# Altium PCB DE-080324.PcbDoc
Units mm, origin at the board's own origin, x right, y up, seen from the top; angles counter-clockwise.
Board outline 48 x 48 mm, 2 copper layers (Top Layer, Bottom Layer); 56 components, 42 nets, 189 pads, 13 vias.
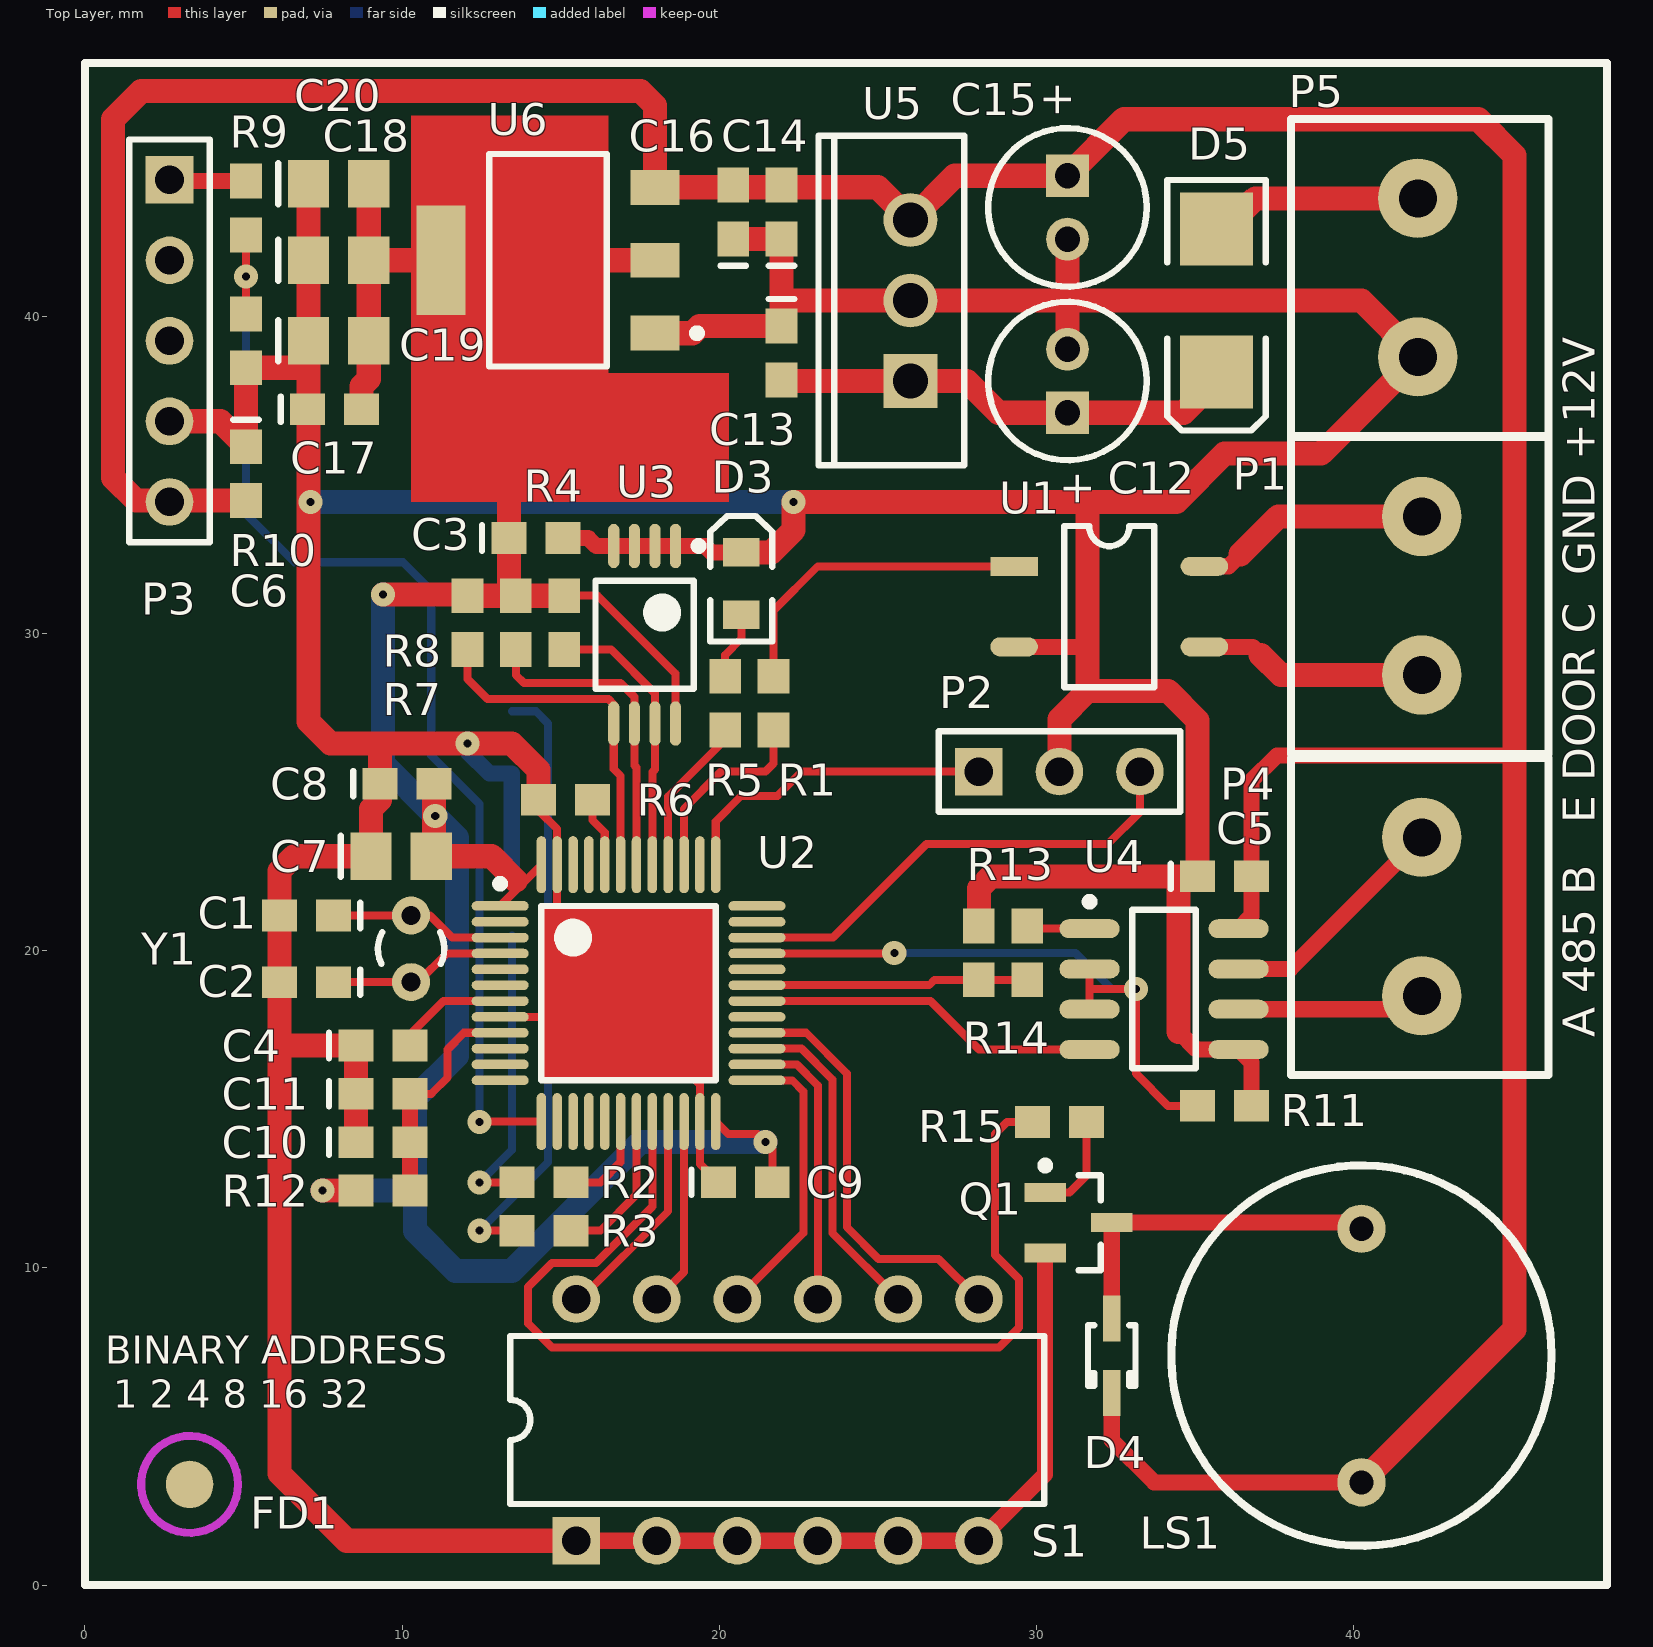
[diagram p0: Top Layer view]
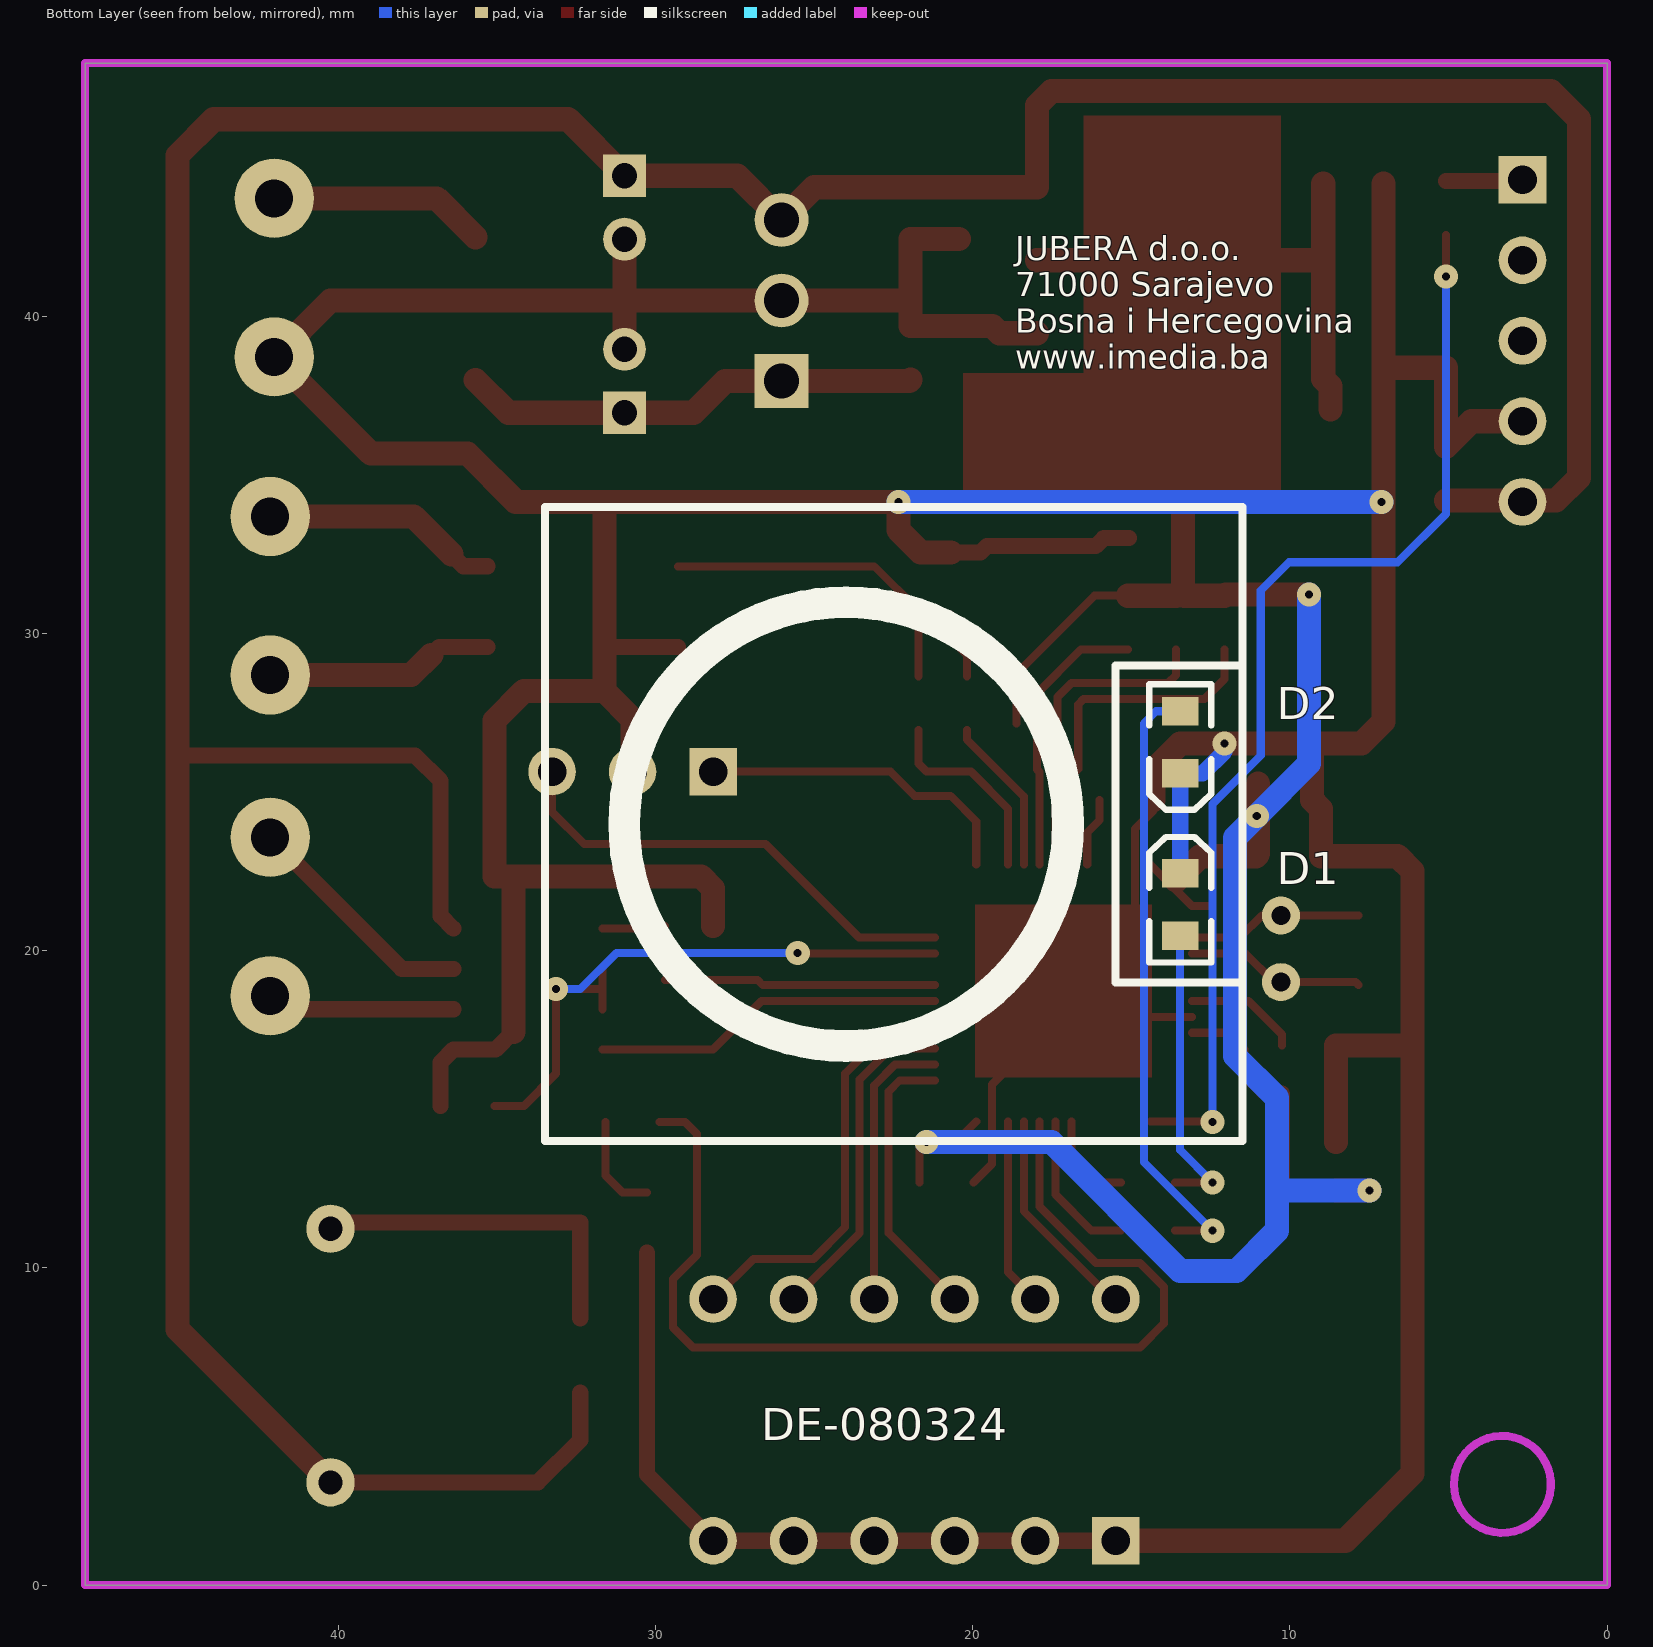
[diagram p1: Bottom Layer view, seen from below]

## Layer stack, top to bottom
Top Solder: solder mask 0.0102, Solder Resist, Dk 3.5
Top Layer: signal copper 0.0356
Dielectric 1: dielectric 0.32, FR-4, Dk 4.8
Bottom Layer: signal copper 0.0356
Bottom Solder: solder mask 0.0102, Solder Resist, Dk 3.5

## Board outline
0,0 0,48 48,48 48,0

## Design rules (kind name [scope] priority, off if disabled: settings)
Clearance [All] p1: gap=0.254 ignorepadtopadclearanceinfootprint=FALSE except(0: Arc-Hole Track-Hole SMDPad-Hole THPad-Hole Via-Hole Fill-Hole Poly-Hole Region-Hole Text-Hole; 0.127: SMDPad-SMDPad; 0.203: Arc-Arc Arc-Track Arc-SMDPad Track-Track Track-SMDPad)
PolygonConnect [All] p1: connectstyle=Relief reliefconductorwidth=0.254 reliefentries=4 polygonreliefangle="90 Angle" airgapwidth=0.254
RoutingVias [All] p1: holewidth=0.711 width=1.27 viastyle="Through Hole" minholewidth=0.254 minwidth=0.762 maxholewidth=0.762 maxwidth=1.524
SolderMaskExpansion [All] p1: expansion=0.102
Width [All] p1: maxlimit=2.54 minlimit=0.254 preferedwidth=0.762
30 further rules are at their usual default settings.

## Components (designator, comment, footprint, x,y, rotation, side; value= is the part's Value field where it differs from the comment)
C1 "6p8" 0603 6.985,21.116 r180 top
C2 "6p8" 0603 6.985,19.016 r180 top
C3 "100nF" 0603 14.224,33.02 r0 top
C4 "100nF" 0603 9.398,17.018 r0 top
C5 "100nF" 0603 35.941,22.352 r0 top
C6 "10nF" 0603 5.08,35.052 r270 top
C7 "10uF" 0805 9.972,22.987 r0 top
C8 "100nF" 0603 10.16,25.273 r0 top
C9 "100nF" 0603 20.828,12.7 r0 top
C10 "10nF" 0603 9.398,13.97 r0 top
C11 "1uF" 0603 9.398,15.494 r0 top
C12 "22uF" CAPPR2-5X11 30.988,37.973 r90 top value=47uF
C13 "100nF" 0603 21.971,38.862 r270 top
C14 "100nF" 0603 21.971,43.307 r90 top
C15 "22uF" CAPPR2-5X11 30.988,43.45 r270 top value=47uF
C16 "100nF" 0603 20.447,43.307 r90 top
C17 "100nF" 0603 7.874,37.084 r0 top
C18 "10uF" 0805 8.001,41.783 r0 top
C19 "10uF" 0805 8.001,39.243 r0 top
C20 "10uF" 0805 8.001,44.196 r0 top
D1 "RED_LED" 2.0X1.25X1.2 13.462,21.463 r90 bottom
D2 "GREEN_LED" 2.0X1.25X1.2 13.462,26.579 r270 bottom
D3 "STATUS_LED" 2.0X1.25X1.2 20.701,31.587 r90 top
D4 "NF" SOD323 32.385,7.239 r270 top
D5 "1N4001" SMB 35.687,40.513 r270 top
FD1 "Fiducial" Fiducial 3.302,3.175 r0 top
LS1 "Buzzer 5Vdc" BUZZER 40.259,7.239 r90 top
P1 "TERMINAL BLOK 2" "TERMINAL BLOK 2" 42.164,31.202 r180 top
P2 "ICSP" HDR1X3 28.194,25.654 r0 top
P3 "RDM6300" HDR1X5 2.667,44.323 r270 top
P4 "TERMINAL BLOK 2" "TERMINAL BLOK 2" 42.164,21.082 r180 top
P5 "TERMINAL BLOK 2" "TERMINAL BLOK 2" 42.037,41.235 r0 top
Q1 "MMBT2222" SOT23_N 31.335,11.43 r0 top
R1 "330R" ERA-0603 21.717,27.813 r90 top
R2 "330R" ERA-0603 14.478,12.7 r180 top
R3 "330R" ERA-0603 14.478,11.176 r180 top
R4 "2K2" ERA-0603 15.113,30.353 r90 top
R5 "2K2" ERA-0603 20.193,27.813 r90 top
R6 "10K" ERA-0603 15.152,24.765 r180 top
R7 "2K2" ERA-0603 13.589,30.353 r90 top
R8 "2K2" ERA-0603 12.065,30.353 r90 top
R9 "1K2" ERA-0603 5.08,43.434 r90 top
R10 "2K2" ERA-0603 5.08,39.243 r90 top
R11 "10K" ERA-0603 35.941,15.113 r0 top
R12 "10R" ERA-0603 9.398,12.446 r0 top
R13 "1K2" ERA-0603 29.718,19.939 r270 top
R14 "2K2" ERA-0603 28.194,19.939 r270 top
R15 "2K2" ERA-0603 30.734,14.605 r0 top
S1 "SW DIP-6" DIP-12/SW 21.844,5.207 r0 top
U1 "PC817" SOP4 29.306,32.131 r0 top
U2 "STM32F030C8T6" STM-LQFP48_N 17.145,18.669 r0 top
U3 "AT24C1024" 8A2_L 17.653,29.972 r270 top
U4 "SN75176BD" D008_L 34.036,18.796 r0 top
U5 "L7805ABV" TO220ABN 26.035,40.513 r90 top
U6 "REG1117-3.3" ZZ311 14.605,41.783 r90 top
Y1 "32.768MHz" R26 10.287,20.066 r180 top

## Footprints (in the part's own frame and the unit in brackets; to place one, negate y for a bottom-side part, rotate by r counter-clockwise, add the part's x,y. Pads: shape width x height; smd on the part's side, far side on the other; paste and mask are expansions set on the pad)
2.0X1.25X1.2 [mm] "SM LED; 2 Flat Leads"
  rect 0.9x1.15 smd: 1(-0.98,0) 2(0.98,0)
  silkscreen extent -1.83,-0.97 2.13,0.97
8A2_L [mm] "TSOP, 8-Leads, Body 3x4.4mm, Pitch 0.65mm, IPC High Density"
  oval 1.4x0.35 smd: 1(-2.8,0.975) 2(-2.8,0.325) 3(-2.8,-0.325) 4(-2.8,-0.975) 5(2.8,-0.975) 6(2.8,-0.325) 7(2.8,0.325) 8(2.8,0.975)
  silkscreen extent -2.92,-1.55 1.7,1.83, body extent -2.25,-1.55 2.25,1.55, height 1.2
0603 [mm] "Chip Capacitor; Body 1.6 x 0.8 mm (LxW typ)"
  rect 1.1x1 smd: 1(-0.85,0) 2(0.85,0)
  silkscreen extent -1.7,-0.4 -1.7,0.4
0805 [mm] "Chip Capacitor; Body 2.0 x 1.2 mm (LxW typ)"
  rect 1.3x1.5 smd: 1(-0.95,0) 2(0.95,0)
  silkscreen extent -1.9,-0.65 -1.9,0.65
BUZZER [mil] "5Vdc PCB buzzer"
  round 60 hole 30: 1(-157.48,0) 2(157.48,0)
  silkscreen extent -236,-236 236,236, body extent -236,-236 236,236, height 378
CAPPR2-5X11 [mm] "Capacitor, Electrolytic, Radial; Body 5 x 11 mm (Dia.xH typ); Pin Spacing 2 mm (typ)"
  rect 1.35x1.35 hole 0.8: 1(-1,0)
  round 1.35 hole 0.8: 2(1,0)
  silkscreen extent -2.5,-2.5 2.5,2.5
D008_L [mm] "SOIC, 8-Leads, Body 4.9x3.9mm, Pitch 1.27mm, IPC High Density"
  oval 1.9x0.6 smd: 1(-2.35,1.905) 2(-2.35,0.635) 3(-2.35,-0.635) 4(-2.35,-1.905) 5(2.35,-1.905) 6(2.35,-0.635) 7(2.35,0.635) 8(2.35,1.905)
  silkscreen extent -2.47,-2.5 1,2.88, body extent -2,-2.5 2,2.5, height 1.75
DIP-12/SW [mm] "DIP Switch; 12 Leads"
  rect 1.5x1.5 hole 0.9: 1(-6.35,-3.81)
  round 1.5 hole 0.9: 2(-3.81,-3.81) 3(-1.27,-3.81) 4(1.27,-3.81) 5(3.81,-3.81) 6(6.35,-3.81) 7(6.35,3.81) 8(3.81,3.81) 9(1.27,3.81) 10(-1.27,3.81) 11(-3.81,3.81) 12(-6.35,3.81)
  silkscreen extent -8.43,-2.65 8.41,2.65
ERA-0603 [mm] "Chip Resistor; Body 1.6 x 0.8 mm (LxW typ)"
  rect 1.1x1 smd: 1(-0.85,0) 2(0.85,0)
Fiducial [mm] "Pick and place machine mark"
  round 1.5 smd paste+0 mask+0.8: 3(0,0)
  Keep-Out Layer circle w0.254: c0,0 r1.529
HDR1X3 [mm] "Connector; Header; 3 Position"
  rect 1.5x1.5 hole 0.9: 1(0,0)
  round 1.5 hole 0.9: 2(2.54,0) 3(5.08,0)
  silkscreen extent -1.27,-1.27 6.35,1.27
HDR1X5 [mm] "Connector; Header; 5 Position"
  rect 1.5x1.5 hole 0.9: 1(0,0)
  round 1.5 hole 0.9: 2(2.54,0) 3(5.08,0) 4(7.62,0) 5(10.16,0)
  silkscreen extent -1.27,-1.27 11.43,1.27
R26 [mm] "Crystal, Thru-Hole; 2 Leads; Body 2.1 x 6.2 mm (Dia.xH)"
  round 1.2 hole 0.6: 1(0,1.05) 2(0,-1.05)
  silkscreen extent -1.05,-0.53 1.05,0.48
SMB [mm] "DO-214-AA/SMB; 2 C-Bend Leads; Body 5.3 x 3.6 mm, inc. leads (LxW)"
  rect 2.3x2.3 smd: 1(-2.25,0) 2(2.25,0)
  silkscreen extent -3.8,-1.55 4.1,1.55
SOD323 [mm] "SOD-323/SC-76; 2 Leads; Body 1.7 x 1.3 mm, (LxW)"
  rect 1.45x0.55 smd: 1(1.175,0) 2(-1.175,0)
  silkscreen extent -0.95,-0.75 0.95,0.75
SOP4 [mm]
  rect 1.5x0.6 smd: 1(0,0)
  oval 1.5x0.6 smd: 2(0,-2.54) 3(6,-2.54) 4(6,0)
  silkscreen extent 1.58,-3.81 4.42,1.27
SOT23_N [mm] "SOT23, 3-Leads, Body 2.9x1.3mm, Pitch 0.95mm, Lead Span 2.3mm, IPC Medium Density"
  rect 1.3x0.6 smd: 1(-1.05,0.95) 2(-1.05,-0.95) 3(1.05,0)
  silkscreen extent -1.17,-1.5 0.7,1.92, body extent -0.7,-1.5 0.7,1.5, height 1.1
STM-LQFP48_N [mm] "QFP, 48-Leads, Body 7x7mm, Pitch 0.5mm, IPC Medium Density"
  oval 1.8x0.3 smd: 1(-4.05,2.75) 2(-4.05,2.25) 3(-4.05,1.75) 4(-4.05,1.25) 5(-4.05,0.75) 6(-4.05,0.25) 7(-4.05,-0.25) 8(-4.05,-0.75) 9(-4.05,-1.25) 10(-4.05,-1.75) 11(-4.05,-2.25) 12(-4.05,-2.75) 25(4.05,-2.75) 26(4.05,-2.25) 27(4.05,-1.75) 28(4.05,-1.25) 29(4.05,-0.75) 30(4.05,-0.25) 31(4.05,0.25) 32(4.05,0.75) 33(4.05,1.25) 34(4.05,1.75) 35(4.05,2.25) 36(4.05,2.75)
  oval 0.3x1.8 smd: 13(-2.75,-4.05) 14(-2.25,-4.05) 15(-1.75,-4.05) 16(-1.25,-4.05) 17(-0.75,-4.05) 18(-0.25,-4.05) 19(0.25,-4.05) 20(0.75,-4.05) 21(1.25,-4.05) 22(1.75,-4.05) 23(2.25,-4.05) 24(2.75,-4.05) 37(2.75,4.05) 38(2.25,4.05) 39(1.75,4.05) 40(1.25,4.05) 41(0.75,4.05) 42(0.25,4.05) 43(-0.25,4.05) 44(-0.75,4.05) 45(-1.25,4.05) 46(-1.75,4.05) 47(-2.25,4.05) 48(-2.75,4.05)
  silkscreen extent -4.17,-2.75 2.75,3.57, body extent -3.5,-3.5 3.5,3.5, height 1.6
"TERMINAL BLOK 2" [mm] "2 pinski terminal blok konektor"
  round 2.5 hole 1.2: 1(0,-2.5) 2(0,2.5)
  silkscreen extent -4,-5 4.13,5
TO220ABN [mm] "TO, Thru-Hole, Vertical, Heatsink Mounted; 3 In-Line Leads; Pitch 2.54 mm; Pin sequence 1, 3, 2"
  rect 1.7x1.7 hole 1.1: 1(-2.54,0)
  round 1.7 hole 1.1: 2(2.54,0) 3(0,0)
  silkscreen extent -5.2,-1.7 5.2,2.9
ZZ311 [mm] "SOT-223/SC-73; 4 Leads; Body 6.7 x 7.3 mm, inc. leads (LxW max)"
  rect 1.1x1.55 smd: 1(-2.3,-3.375) 2(0,-3.375) 3(2.3,-3.375)
  rect 3.45x1.55 smd: 4(0,3.375)
  silkscreen extent -3.35,-4.83 3.35,1.85

## Part data
C1 C2 C3 C4 C5 C6 C8 C9 C10 C11 C13 C14 C16 C17: library part C0603, "Ceramic Chip Capacitor - Standard", PackageDocument=Mar-2001, Code_IPC="1608 [0603]", Code_JEITA=0603, ComponentLink1Description="Manufacturer Link", ComponentLink1URL=http://www.kemet.com/, ComponentLink2Description=Datasheet, ComponentLink2URL=http://www.kemet.com/kemet/web/homepage/kechome.nsf/vapubfilesname/F3102TA.pdf/$file/F3102TA.pdf, DatasheetDocument=Mar-2001, LatestRevisionDate=19-Mar-2004, LatestRevisionNote="Silkscreen size reduced.", Note="Footprint corresponds to dimensions for bulk cassette packaging. This case size has tightened tolerances.", PackageReference=0603, Published=17-Jul-2002, Publisher="Altium Limited"
C7 C18 C19 C20: library part C0805, "Ceramic Chip Capacitor - Standard", PackageDocument=Mar-2001, Code_IPC=2012[0805], Code_JEITA=0805, ComponentLink1Description="Manufacturer Link", ComponentLink1URL=http://www.kemet.com/, ComponentLink2Description=Datasheet, ComponentLink2URL=http://www.kemet.com/kemet/web/homepage/kechome.nsf/vapubfilesname/F3102TA.pdf/$file/F3102TA.pdf, DatasheetDocument=Mar-2001, LatestRevisionDate=19-Mar-2004, LatestRevisionNote="Silkscreen size reduced.", Note="Footprint corresponds to dimensions for bulk cassette packaging. This case size has tightened tolerances.", PackageReference=0805, Published=17-Jul-2002, Publisher="Altium Limited"
C12 C15: library part EKA00AA247F00, "Aluminum Electrolytic Capacitor, Radial Style with Long Leads: 47uF, 35V", ComponentLink1Description="Manufacturer Link", ComponentLink1URL=http://www.vishay.com/, ComponentLink2Description=Datasheet, ComponentLink2URL=http://www.vishay.com/docs/25014/eka.pdf, DatasheetDocument=20-Feb-2001, DrillSize="Nominal, Rounded To The Nearest 0.1mm", Note="Refer to Manufacturer's Data Sheets for other lead formations", PackageReference=CAPPR2-5X11, Published=19-Mar-2004, Publisher="Altium Limited"
D1 D2 D3: library part HSMC-C540-F0001, "Top Mount AS AlInGaP Red Oval Lens High Brightness", LED_Colour=Red, PackageDocument=30-Apr-2002, ComponentLink1Description="Manufacturer Link", ComponentLink1URL=http://www.agilent.com/, ComponentLink2Description=Datasheet, ComponentLink2URL=http://cp.literature.agilent.com/litweb/pdf/5988-5794EN.pdf, DatasheetDocument=7-Mar-2002, LuminousIntensity="96mcd (Minimum).", PackageReference=2.0X1.25X1.2, PCB_Layout="Complies with manufacturer's recommendation.", Published=11-Dec-2002, Publisher="Altium Limited"
D4: library part BAS321, "General-purpose Diode", ComponentLink1Description="Manufacturer Link", ComponentLink1URL=http://www.semiconductors.philips.com/, ComponentLink2Description=Datasheet, ComponentLink2URL=http://www.semiconductors.philips.com/acrobat/datasheets/BAS321_2.pdf, DatasheetVersion=9-Feb-1999, LatestRevisionDate=19-Mar-2004, LatestRevisionNote="Silkscreen size reduced.", PackageDescription="SOD-323/SC-76; 2 Leads; Body 1.7 x 1.3 mm, (LxW)", PackageReference=SOD323, PackageVersion=May-1999, Published=17-Sep-2003, Publisher="Altium Limited"
D5: library part 10BQ100, "Schottky Rectifier", ComponentLink1Description="Manufacturer Link", ComponentLink1URL=http://www.irf.com/, ComponentLink2Description=Datasheet, ComponentLink2URL=http://www.irf.com/product-info/datasheets/data/10bq100.pdf, DatasheetVersion=PD-2.437A, LatestRevisionDate=17-Jul-2002, LatestRevisionNote="Re-released for DXP Platform.", PackageDescription="DO-214-AA/SMB; 2 C-Bend Leads; Body 5.3 x 3.6 mm, inc. leads (LxW)", PackageReference=SMB, Published=8-Jun-2000, Publisher="Altium Limited"
FD1: library part Fiduchial, "Fiduchial mark"
LS1: library part BUZZER, "5Vdc PCB buzzer"
P1 P4 P5: "2 pinski terminal blok"
P2: library part "Header 3", "Header, 3-Pin", LatestRevisionDate=17-Jul-2002, LatestRevisionNote="Re-released for DXP Platform.", Publisher="Altium Limited"
P3: library part "Header 5", "Header, 5-Pin", LatestRevisionDate=17-Jul-2002, LatestRevisionNote="Re-released for DXP Platform.", Publisher="Altium Limited"
Q1: library part BC817, "NPN General-purpose Transistor", ComponentLink1Description="Manufacturer Link", ComponentLink1URL=http://www.semiconductors.philips.com/, ComponentLink2Description=Datasheet, ComponentLink2URL=http://www.semiconductors.philips.com/acrobat/datasheets/BC817_BC817W_BC337_5.pdf, DatasheetVersion=Jun-1999, LatestRevisionDate=12-Dec-2006, LatestRevisionNote="IPC-7351 Footprint Added.", PackageDescription="3-Pin SOT-23 Package 0.95 mm Pitch, 2.3 mm Lead Span", PackageReference=SOT23, PackageVersion=May-1999, Published=17-Sep-2003, Publisher="Altium Limited"
R1 R2 R3 R4 R5 R6 R7 R8 R9 R10 R11 R12 R13 R14 R15: library part ERAV, "Metal Film Thermosensitive Chip Resistor, 0.56 Ohm to 10k Ohm Range, 5% Tolerance, 0603 Size, 0.063 W", PackageDocument=Mar-2003, Code_IPC="1608 [0603]", ComponentLink1Description="Manufacturer Link", ComponentLink1URL=http://www.panasonic.com/industrial/components/resistive_products.htm, ComponentLink2Description=Datasheet, ComponentLink2URL=http://www.panasonic.com/industrial/components/pdf/AOF0000CE1.pdf, LatestRevisionDate=19-Mar-2004, LatestRevisionNote="Silkscreen size reduced.", Note="If flow soldering, adjust pad width of PCB Footprint to 0.7 - 0.8 times the width of the resistor.", PackageReference=ERA-0603, Published=17-Dec-2003, Publisher="Altium Limited"
S1: "DIP Switch, 6 Position, SPST", LatestRevisionDate=17-Jul-2002, LatestRevisionNote="Re-released for DXP Platform.", PackageDescription="DIP Switch; 12 Leads", PackageReference=DIP-12/SW, Published=24-Mar-1999, Publisher="Altium Limited"
U1: library part "PC817 optocoupler", "4-Pin Phototransistor Optocoupler", DatasheetVersion=Nov-2003, LatestRevisionDate=04-Mar-2005, LatestRevisionNote="Sch pins 3 & 4 Swapped.", PackageReference=DIP-4, Published=24-Mar-1999, Publisher="Altium Limited"
U2: "ARM Cortex-M0 32-bit MCU, 64 KB Flash, 8 KB Internal RAM, 39 I/Os, 48-pin LQFP, -40 to 85 degC, Tray", I/Os (High Current)=39, Operating Frequency(F) (Processor speed) (MHz)=48, Supplier Part Number 1=497-14043-ND, Supply Voltage(Vcc) min (V)=2.4, ComponentLink1Description="Manufacturer URL", ComponentLink1URL=http://www.st.com/web/en/home.html, ComponentLink2Description=Datasheet, ComponentLink2URL=http://www.st.com/st-web-ui/static/active/en/resource/technical/document/datasheet/DM00088500.pdf, ComponentLink3Description="Package Specification", ComponentLink3URL=http://www.st.com/st-web-ui/static/active/en/resource/technical/document/datasheet/DM00058181.pdf, Core="ARM Cortex-M0", DatasheetVersion="Rev. 1", FLASH Size (Prog) (kB)=64, Internal RAM Size (kB)=8, Mounting Technology="Surface Mount", PackageDescription="48-Pin Low Profile Quad Flat Package, 7 x 7 mm Body, 0.5 mm Pitch", PackageReference=LQFP48, PackageVersion="Rev. 6, 06/2013", Packing=Tray, PartNumber=STM32F030C8T6, Supplier 1=Digi-Key, Supplier 2=Newark, Supplier 3=Mouser, Supplier Part Number 2=06X3647, Supplier Part Number 3=511-STM32F030C8T6
U3: library part AT24C02B-TP25-T, "2Kbit (256 x 8), 2-wire Bus Automotive Serial EEPROM with full memory Write Protect, 2.5V, 8-Pin TSSOP, Tape & Reel", Code_JEDEC=MO-153-AA, ComponentLink1Description="Manufacturer Link", ComponentLink1URL=http://www.atmel.com/products/serial/default.asp, ComponentLink2Description=Datasheet, ComponentLink2URL=http://www.atmel.com/dyn/resources/prod_documents/doc8517.pdf, ComponentLink3Description="Atmel.com Home", ComponentLink3URL=http://www.atmel.com, DatasheetVersion="8517C,  Jan-2009", PackageDescription="8-Lead, 4.4 mm Body, Plastic Thin Shrink Small Outline Package (TSSOP)", PackageReference=8A2, PackageVersion="revD, Dec-2009", Published=20-Sep-2010, Publisher="Altium Limited"
U4: "Differential Bus Transceiver", Code_IPC=SOIC127P600-8, ComponentLink1Description="Manufacturer Link", ComponentLink1URL=http://www.ti.com/, ComponentLink2Description=Datasheet, ComponentLink2URL=http://www-s.ti.com/sc/ds/sn75176b.pdf, DatasheetVersion=Sep-1989, LatestRevisionDate=13-Apr-2006, LatestRevisionNote="IPC-7351 Footprint Added.", Note="Receiver Hysteresis of 50mV Typical", PackageDescription="8-Pin Small Outline Integrated Circuit 1.27 mm Pitch", PackageReference=D008, PackageVersion=Jan-1998, Published=15-May-2002, Publisher="Altium Limited"
U5: "Precision 1A Regulator", ComponentLink1Description="Manufacturer Link", ComponentLink1URL=http://www.st.com/, ComponentLink2Description=Datasheet, ComponentLink2URL=http://www.st.com/stonline/products/literature/ds/2144/l7805ab.pdf, DatasheetVersion=Nov-1999, LatestRevisionDate=17-Jul-2002, LatestRevisionNote="Re-released for DXP Platform.", Note="Tab is connected to pin 3 (GND).", PackageDescription="TO, Thru-Hole, Vertical, Heatsink Mounted; 3 In-Line Leads; Pitch 2.54 mm; Pin sequence 1, 3, 2", PackageReference=TO220ABN, PackageVersion=Jun-1998, Published=24-Aug-2001, Publisher="Altium Limited"
U6: "800mA and 1A Low Dropout Positive Regulator 2.85V, 3.3V, 5V, and Adjustable", ComponentLink1Description="Manufacturer Link", ComponentLink1URL=http://www.ti.com/, ComponentLink2Description=Datasheet, ComponentLink2URL=http://www-s.ti.com/sc/ds/REG1117.pdf, DatasheetVersion=Sep-1997, LatestRevisionDate=17-Jul-2002, LatestRevisionNote="Re-released for DXP Platform.", PackageDescription="SOT-223/SC-73; 4 Leads; Body 6.7 x 7.3 mm, inc. leads (LxW max)", PackageReference=ZZ311, PackageVersion=revC, Published=8-Jun-2000, Publisher="Altium Limited"
Y1: library part R26-32.768, "Tuning Fork Crystal Unit", ComponentLink1Description="Manufacturer Link", ComponentLink1URL=http://www.raltron.com/products/microcrystals/default.asp, ComponentLink2Description=Datasheet, ComponentLink2URL=http://www.raltron.com/products/pdfspecs/crystal_r38_26_145.pdf, DatasheetDocument=28-Sep-1998, LatestRevisionDate=17-Jul-2002, LatestRevisionNote="Re-released for DXP Platform.", PackageReference=R26, Published=8-Jun-2000, Publisher="Altium Limited"

## Via types
v1: diameter 0.762, hole 0.254, Top Layer to Bottom Layer, 13 vias

## Nets (pads, with @x,y where several pads share a name; then routed paths per layer and width w, separated by ;. In a path a pad name is that pad's centre, name@x,y a point inside that pad or via, vN(x,y) a via of type N, cw(c..) or ccw(c..) an arc to the next point about the centre after c; other vN are vias at no path point)
+3V3: C3.1 C7.2 C8.2 C9.2 C17.2 C18.2 C19.2 C20.2 R4.2 R7.2 R8.2 R12.1 U2.1 U2.24 U2.48 U3.8 U6.2 U6.4 | length 82
  Top Layer w0.254: U2.1@12.49,21.419 U2.1 U2.48 ; R7.2@13.374,31.242 13.335,31.203 R7.2 ; R4.2 16.168,31.203 18.628,28.743 U3.8 ; U2.24 20.29,14.224 21.209,14.224 v1(21.463,13.97) 21.678,13.755 C9.2
  Top Layer w0.762: v1(7.493,12.446) R12.1 ; C17.2 8.724,37.807 8.951,38.034 C19.2 C18.2 ; C20.2 C18.2 ; v1(9.398,31.242) 12.026,31.242 R8.2 R7.2@13.335,31.203 ; C8.2 11.01,23.075 11.028,23.034 11.075,22.987 12.827,22.987 13.589,22.225 ; R7.2@13.374,31.242 C3.1 13.374,35.433 ; R7.2 R4.2 ; U6.2 U6.4 C18.2
  Bottom Layer w0.762: v1(7.493,12.446) 10.287,12.446 10.414,12.319 ; v1(9.398,31.242) 9.398,25.908 v1(11.049,24.257) 11.735,23.571 11.735,16.688 10.414,15.367 10.414,12.319 ; v1(21.463,13.97) 17.526,13.97 13.462,9.906 11.684,9.906 10.414,11.176 10.414,12.319
+5V: C5.2 C6.2 C14.2 C15.1 C16.2 D4.1 LS1.1 P3.5 U4.8 U5.2 U6.3 | length 132.6
  Top Layer w0.508: D4.1 32.385,4.572 33.718,3.239 LS1.1 ; U4.8 36.791,21.106 C5.2 36.791,25.361 37.592,26.162 45.085,26.162
  Top Layer w0.762: C6.2 1.612,34.202 0.889,34.925 0.889,46.228 1.778,47.117 17.526,47.117 17.98,46.663 U6.3 25.005,44.083 U5.2 27.432,44.45 C15.1 32.766,46.228 43.942,46.228 45.085,45.085 45.085,26.162 45.085,8.065 LS1.1
ADDRESS_1: S1.12 U2.21 | length 6.9
  Top Layer w0.254: S1.12 15.621,9.017 18.395,11.791 U2.21
ADDRESS_2: S1.11 U2.22 | length 6
  Top Layer w0.254: S1.11 18.895,9.878 U2.22
ADDRESS_4: S1.10 U2.25 | length 9
  Top Layer w0.254: S1.10 22.657,11.1 22.657,15.57 22.308,15.919 U2.25
ADDRESS_8: S1.9 U2.26 | length 8.9
  Top Layer w0.254: U2.26 22.455,16.419 23.114,15.76 S1.9
ADDRESS_16: S1.8 U2.27 | length 10.6
  Top Layer w0.254: U2.27 22.601,16.919 23.571,15.949 23.571,11.1 S1.8
ADDRESS_32: S1.7 U2.28 | length 13.3
  Top Layer w0.254: U2.28 22.748,17.419 24.028,16.138 24.028,11.289 25.031,10.287 26.924,10.287 S1.7
BUZZER: R15.1 U2.20 | length 32.6
  Top Layer w0.254: U2.20 17.895,11.938 16.117,10.16 14.732,10.16 13.97,9.398 13.97,8.255 14.732,7.493 28.829,7.493 29.464,8.128 29.464,9.652 28.702,10.414 28.702,14.224 29.083,14.605 R15.1
DOOR_LOCK: R1.1 U2.39 | length 6.2
  Top Layer w0.254: U2.39 18.895,24.483 20.066,25.654 21.463,25.654 21.717,25.908 R1.1
I2C1_SCL: R7.1 U2.42 U3.6 | length 10.2
  Top Layer w0.254: R7.1 13.589,28.702 13.843,28.448 16.891,28.448 17.328,28.011 U3.6 17.328,25.852 17.395,25.785 U2.42 U2.42@17.415,22.719
I2C1_SDA: R8.1 U2.43 U3.5 | length 11
  Top Layer w0.254: R8.1 12.065,28.575 12.7,27.94 16.51,27.94 16.678,27.772 U3.5 16.678,25.74 16.895,25.523 U2.43
ICSP_SWCLK: P2.1 U2.37 | length 10.3
  Top Layer w0.254: U2.37 19.895,24.086 20.701,24.892 21.844,24.892 22.606,25.654 P2.1
ICSP_SWDIO: P2.3 U2.34 | length 15
  Top Layer w0.254: U2.34 23.594,20.419 26.543,23.368 32.258,23.368 33.274,24.384 P2.3
LED_GREEN: R3.1 U2.19 | length 4.8
  Top Layer w0.254: R3.1 16.256,11.176 17.395,12.315 U2.19
LED_RED: R2.1 U2.18 | length 3.1
  Top Layer w0.254: R2.1 16.256,12.7 16.895,13.339 U2.18
LED_STATUS: R5.1 U2.40 | length 5
  Top Layer w0.254: U2.40 18.395,24.872 20.193,26.67 R5.1
NetC4_2: C4.2 U2.7 | length 3.6
  Top Layer w0.254: C4.2 10.248,17.36 11.307,18.419 U2.7
NetC10_2: C10.2 C11.2 R12.2 U2.9 | length 7.2
  Top Layer w0.254: C11.2 10.922,15.494 11.43,16.002 11.43,16.891 11.958,17.419 U2.9
  Top Layer w0.508: R12.2 C10.2 C11.2
NetC12_1: C12.1 C13.2 D5.2 U5.1 | length 14.6
  Top Layer w0.762: C13.2 22.01,37.973 U5.1 27.813,37.973 28.813,36.973 C12.1 34.651,36.973 D5.2@35.687,38.009
NetD1_1: D1.1 R2.2 | length 9.4
  Top Layer w0.254: v1(12.446,12.7) R2.2
  Bottom Layer w0.254: v1(12.446,12.7) 13.462,13.716 D1.1
NetD2_1: D2.1 R3.2 | length 19.4
  Top Layer w0.254: v1(12.446,11.176) R3.2
  Bottom Layer w0.254: v1(12.446,11.176) 14.605,13.335 14.605,27.178 14.224,27.559 D2.1
NetD3_1: D3.1 R5.2 | length 2.2
  Top Layer w0.254: R5.2 20.193,29.337 20.701,29.845 D3.1
NetD4_2: D4.2 LS1.2 Q1.3 | length 11
  Top Layer w0.254: LS1.2@40.068,11.43 LS1.2
  Top Layer w0.508: D4.2 Q1.3 LS1.2@40.068,11.43
NetD5_1: D5.1 P5.2 | length 6.9
  Top Layer w0.762: D5.1@35.687,42.509 36.913,43.735 P5.2
NetP1_1: P1.1 U1.4 | length 7.5
  Top Layer w0.508: U1.4 36.068,32.131 36.449,32.512
  Top Layer w0.762: 36.449,32.512 37.639,33.702 P1.1
NetP1_2: P1.2 U1.3 | length 7.2
  Top Layer w0.508: U1.3 36.83,29.591 37.084,29.337
  Top Layer w0.762: 37.084,29.337 37.719,28.702 P1.2
NetP3_1: P3.1 R9.2 | length 2.4
  Top Layer w0.254: P3.1 P3.1@2.706,44.284
  Top Layer w0.508: P3.1@2.706,44.284 R9.2
NetP4_1: P4.1 U4.7 | length 7.5
  Top Layer w0.508: U4.7 38.013,19.431 P4.1
NetP4_2: P4.2 U4.6 | length 6
  Top Layer w0.508: U4.6 41.743,18.161 P4.2
NetQ1_1: Q1.1 R15.2 | length 3.2
  Top Layer w0.254: Q1.1 31.049,12.38 31.584,12.915 R15.2
NetR1_2: R1.2 U1.1 | length 10.2
  Top Layer w0.254: R1.2 21.717,30.734 23.114,32.131 U1.1
NetR6_1: R6.1 U2.44 | length 2.2
  Top Layer w0.254: R6.1 16.002,24.13 16.395,23.737 U2.44
NetR13_1: R13.1 U4.1 | length 2
  Top Layer w0.254: R13.1 29.806,20.701 U4.1
OSC32_IN: C1.1 U2.3 Y1.2 | length 5.5
  Top Layer w0.254: C1.1 Y1.2 10.888,21.116 11.585,20.419 U2.3
OSC32_OUT: C2.1 U2.4 Y1.1 | length 5.7
  Top Layer w0.254: C2.1@7.835,18.923 7.928,19.016 Y1.1 10.507,19.016 11.41,19.919 U2.4
USART1_DE: R11.1 U2.33 U4.2 U4.3 | length 20.2
  Top Layer w0.254: U2.33 v1@25.507,19.919 ; U4.3 31.686,18.796 ; U4.2 31.686,18.796 ; R11.1 34.163,15.113 33.147,16.129 v1(33.147,18.796) 31.686,18.796
  Bottom Layer w0.254: v1(25.527,19.939) 31.242,19.939 32.385,18.796 v1(33.147,18.796)
USART1_RX: R13.2 R14.2 U2.31 | length 8.6
  Top Layer w0.254: U2.31 26.627,18.919 26.797,19.089 R14.2 R13.2
USART1_TX: U2.30 U4.4 | length 11.1
  Top Layer w0.254: U2.30 26.666,18.419 28.194,16.891 U4.4
USART2_RX: R9.1 R10.2 U2.13 | length 36.2
  Top Layer w0.254: R10.2 v1(5.08,41.275) R9.1 ; v1(12.446,14.605) 12.46,14.619 U2.13
  Bottom Layer w0.254: v1(5.08,41.275) 5.08,33.782 6.604,32.258 10.033,32.258 10.922,31.369 10.922,26.162 12.446,24.638 v1(12.446,14.605)
VSS: C1.2 C2.2 C3.2 C4.1 C5.1 C6.1 C7.1 C8.1 C9.1 C10.1 C11.1 C12.2 C13.1 C14.1 C15.2 C16.1 C17.1 C18.1 C19.1 C20.1 D1.2 D2.2 D3.2 P2.2 P3.4 P5.1 Q1.2 R6.2 R10.1 R11.2 R14.1 S1.1 S1.2 S1.3 S1.4 S1.5 S1.6 U1.2 U2.8 U2.23 U2.47 U3.1 U3.2 U3.3 U3.4 U4.5 U5.3 U6.1 | length 234.3
  Top Layer w0.254: U2.8 15.355,17.919 15.367,17.907 17.272,17.907 19.395,15.784 U2.23 19.395,13.283 C9.1 ; R6.2 14.302,24.433 14.895,23.84 U2.47 14.895,18.578
  Top Layer w0.508: C3.2 15.875,33.02 16.129,32.766 19.558,32.766 19.757,32.567 D3.2 ; S1.1 S1.2 S1.3 S1.4 S1.5 S1.6 30.285,3.488 Q1.2 ; U1.2 31.623,29.591 ; 34.493,17.45 35.052,16.891 U4.5 36.791,16.486 R11.2
  Top Layer w0.762: P3.4 4.279,36.703 C6.1 R10.1 6.963,38.393 7.051,38.481 ; C20.1 C18.1 C19.1 7.051,38.481 ; C10.1 C11.1 C4.1 6.135,17.018 ; 9.31,26.289 C8.1 9.31,24.765 9.022,24.477 C7.1 6.604,22.987 6.135,22.518 C1.2 C2.2 6.135,17.018 ; R6.2 14.302,25.703 13.462,26.543 v1(12.065,26.543) 7.747,26.543 7.051,27.239 7.051,38.481 ; S1.1 8.255,1.397 6.135,3.517 6.135,17.018 ; U6.1 19.163,39.483 19.392,39.712 C13.1 21.971,40.64 ; C16.1 C14.1 21.971,40.64 ; D3.2 21.645,32.567 22.352,33.274 v1(22.352,34.163) 31.623,34.163 ; R14.1 28.194,21.971 28.575,22.352 34.417,22.352 ; P2.2 30.734,27.305 31.623,28.194 ; C12.2 30.988,40.513 ; C15.2 30.988,40.513 ; 34.493,17.45 34.493,22.276 34.417,22.352 ; 21.971,40.64 22.098,40.513 U5.3 30.988,40.513 ; 30.988,40.513 40.259,40.513 P5.1 38.989,35.687 35.941,35.687 34.417,34.163 31.623,34.163 ; 31.623,28.194 34.163,28.194 35.091,27.266 C5.1 34.417,22.352 ; 31.623,28.194 31.623,29.591 31.623,34.163
  Bottom Layer w0.508: v1(12.065,26.543) 12.065,26.289 12.755,25.599 D2.2 D1.2
  Bottom Layer w0.762: v1(7.112,34.163) v1(22.352,34.163)
WR_ENABLE: R4.1 U2.41 U3.7 | length 8.9
  Top Layer w0.254: R4.1 16.598,29.503 17.978,28.123 U3.7 17.978,25.725 17.895,25.642 U2.41
pads on no net: FD1.3 P3.2 P3.3 U2.2 U2.5 U2.6 U2.10 U2.11 U2.12 U2.14 U2.15 U2.16 U2.17 U2.29 U2.32 U2.35 U2.36 U2.38 U2.45 U2.46

## Keep-outs
Keep-Out Layer:
  the board outline again, w0.254

## Other copper
Top Layer:
  rectangle net +3V3: 14.859,34.163 20.32,38.227
  rectangle net +3V3: 10.287,34.163 16.51,46.355
  rectangle net VSS: 14.351,16.002 19.939,21.463

## Silkscreen, mask and mechanical layers (free items; w line width, h text height)
Top Overlay:
  the board outline again, w0.254
  text "A 485 B   E DOOR C  GND +12V" at 47.625,17.272 h1.02 r90
  text "BINARY ADDRESS" at 0.635,6.985 h0.89
  text "1 2 4 8 16 32" at 0.889,5.588 h0.89
Bottom Overlay:
  circle w1: c24,24 r7
  lines w0.254: 11.5,19 15.5,19 15.5,29 11.5,29 ; 11.5,14 11.5,34 33.5,34 33.5,14 11.5,14
  text "JUBERA d.o.o. / 71000 Sarajevo / Bosna i Hercegovina / www.imedia.ba" at 18.669,38.354 h0.76
  text "DE-080324" at 26.67,4.572 h1.02
Mechanical 1:
  the board outline again, w0.254

## Dimensions
48.006,48.006 to 48.006,0.006 on Mechanical 13
0.006,48.006 to 48.006,48.006 on Mechanical 13

## Text inside footprints (layer, text, board x,y; h text height)
C12: Top Overlay "+" at 31.738,33.998 h1.02 r90
C15: Top Overlay "+" at 30.238,47.425 h1.02 r270